# Altium PCB erb-pcb0002.PcbDoc
Units mm, origin at the board's own origin, x right, y up, seen from the top; angles counter-clockwise.
Board outline 37 x 24 mm, 4 copper layers (Top Layer, Signal_1, Signal_2, Top Bottom), stack 1.57 mm thick; 26 components, 49 nets, 129 pads, 38 vias.
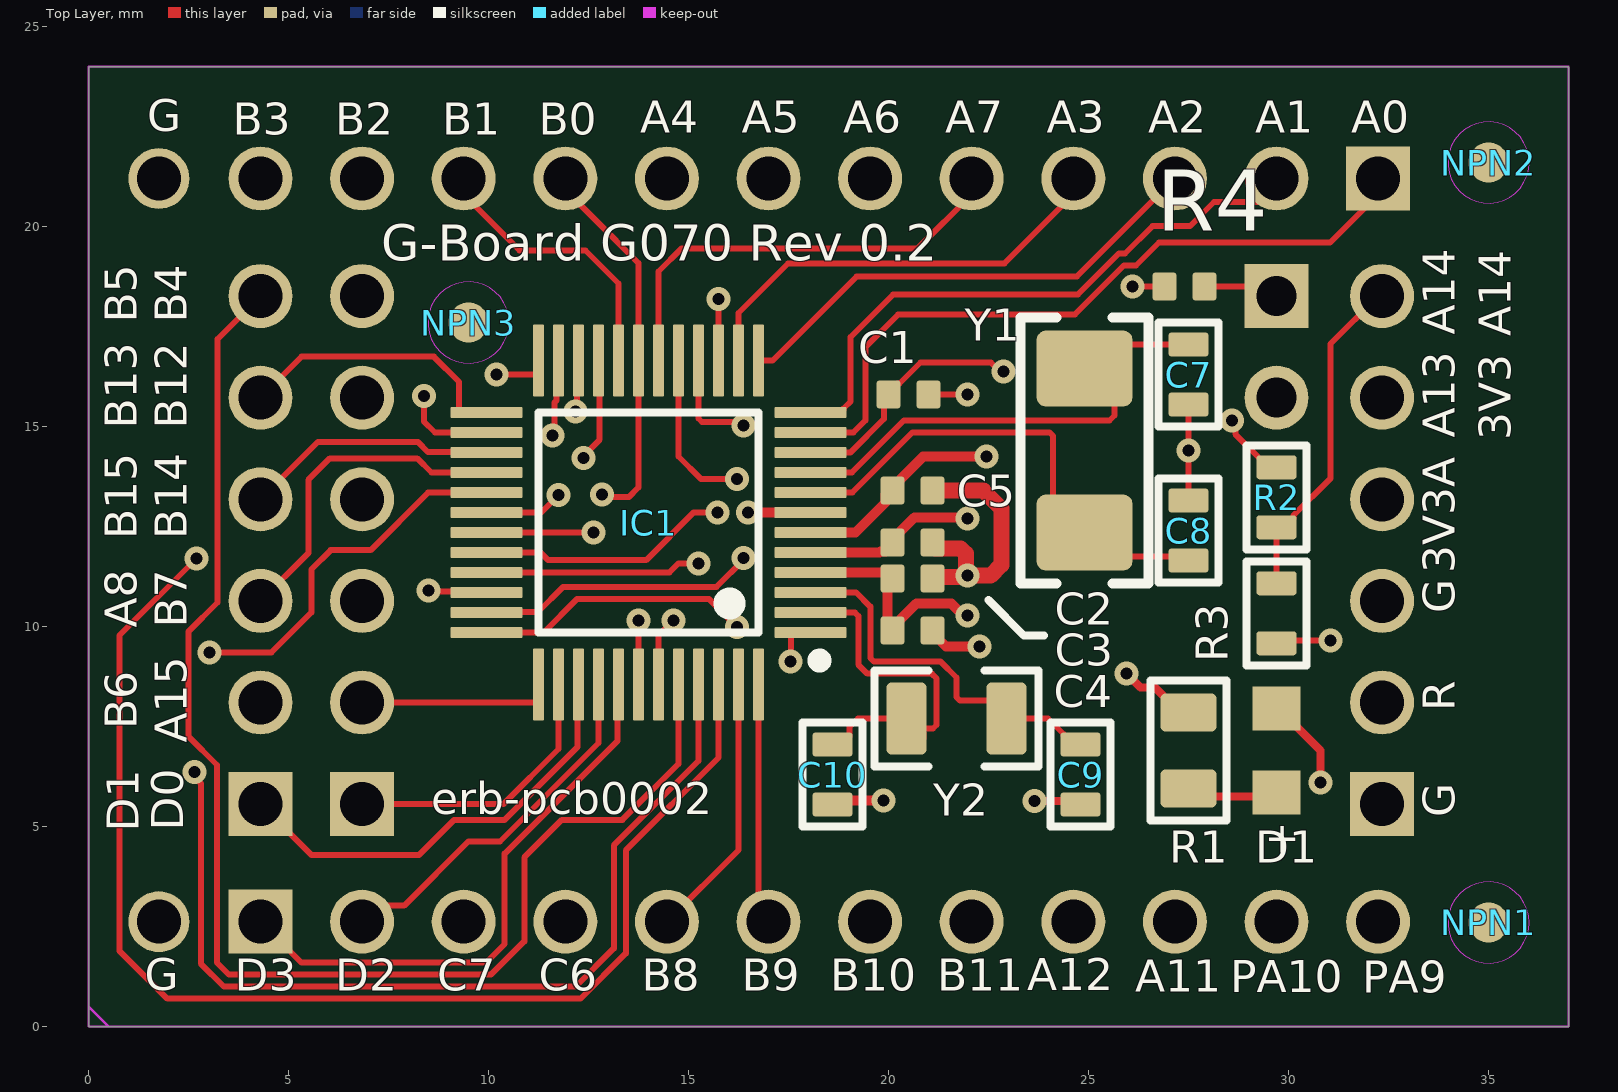
[diagram p0: Top Layer view]
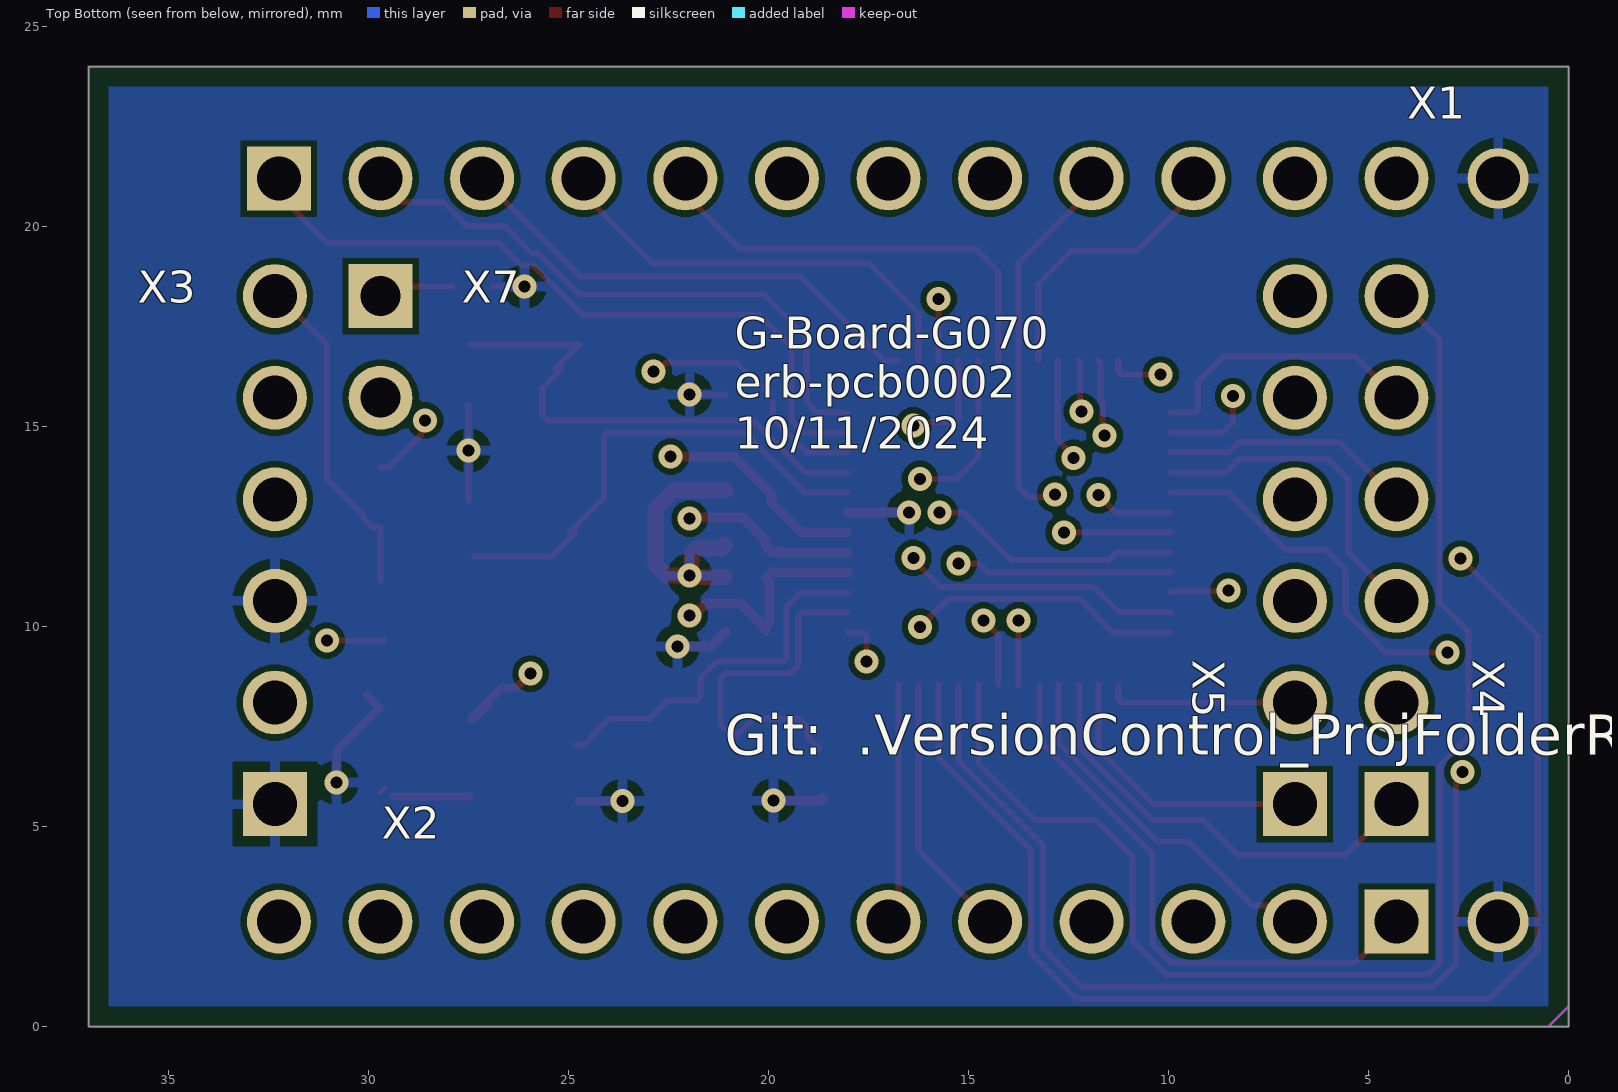
[diagram p1: Top Bottom view, seen from below]
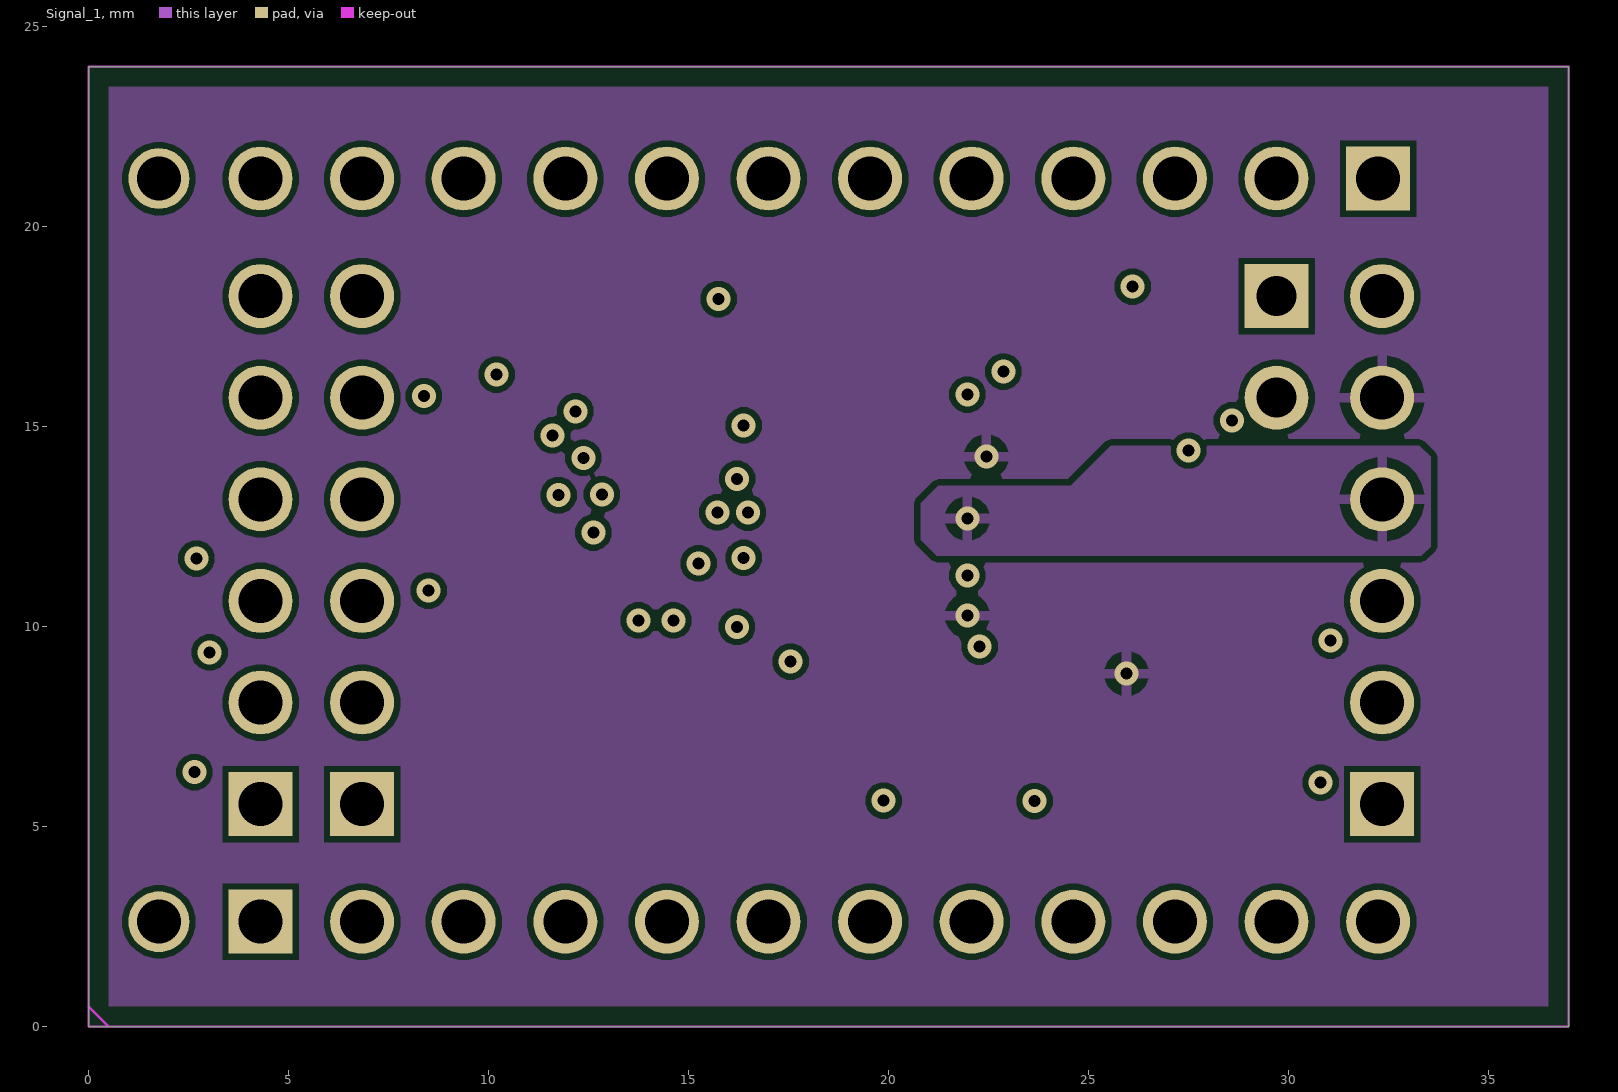
[diagram p2: Signal_1]
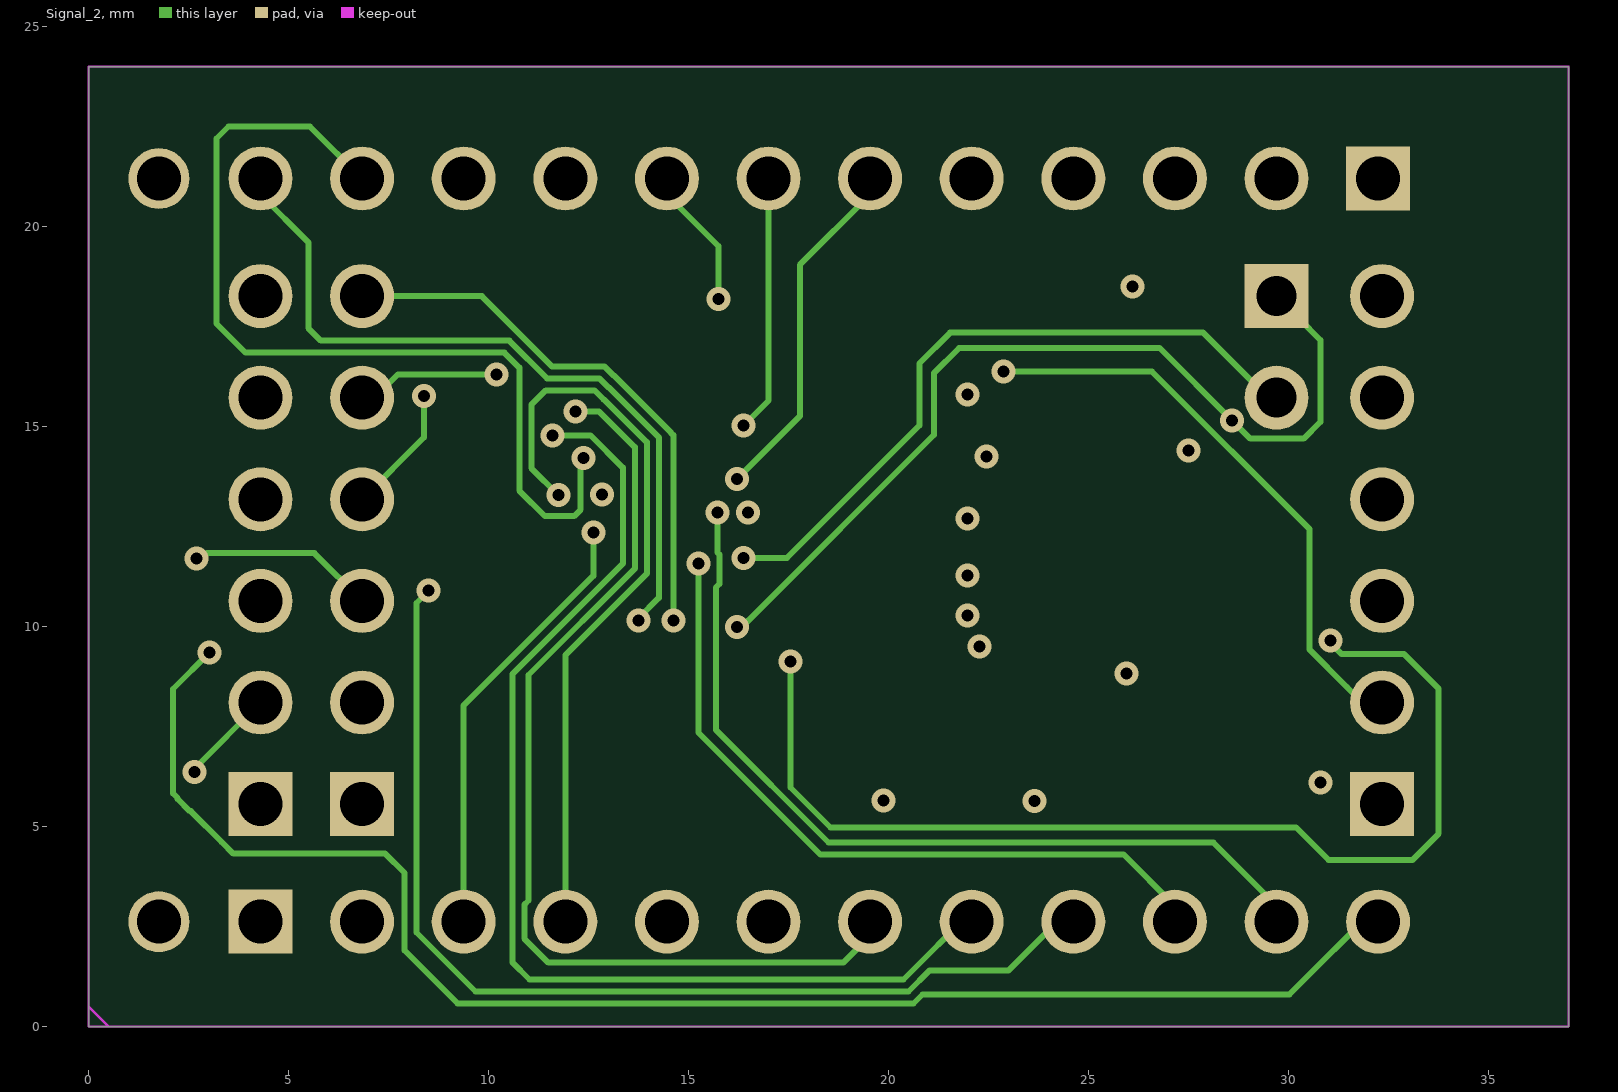
[diagram p3: Signal_2]
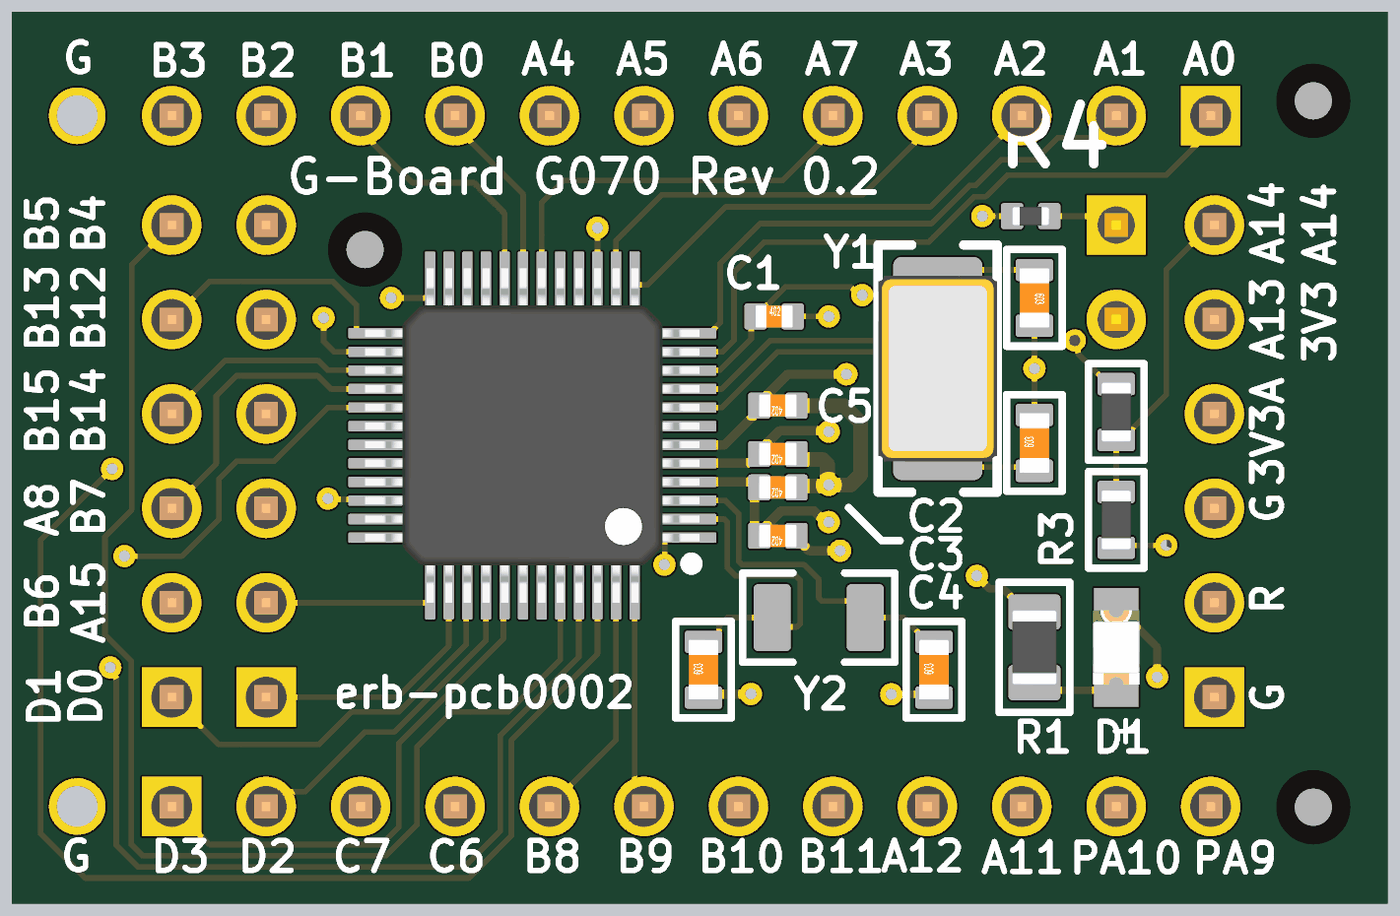
[diagram p4: 3D render of the assembled board from above, using the file's embedded part models]
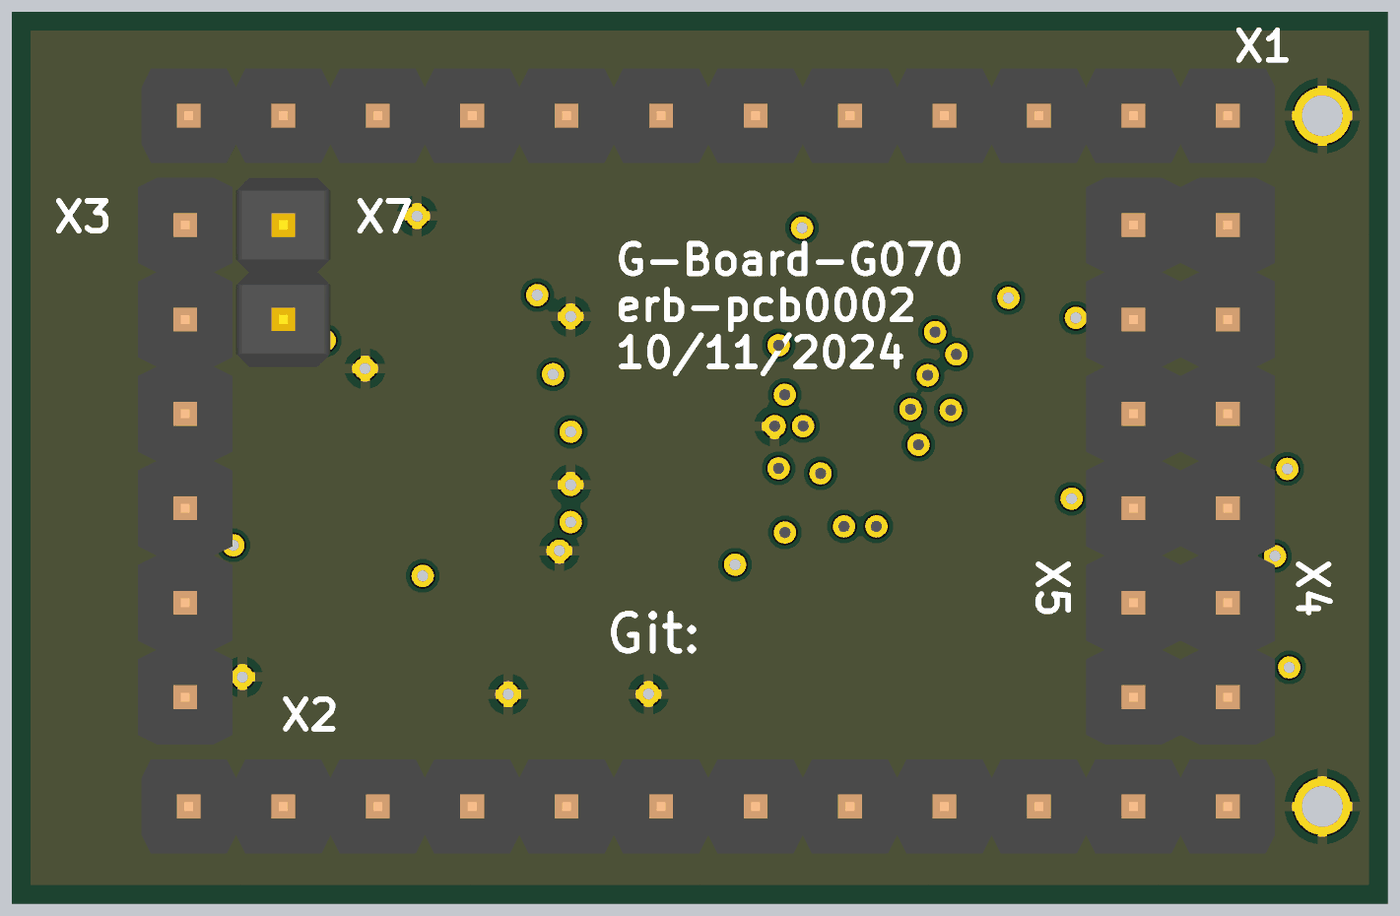
[diagram p5: 3D render of the assembled board from below, using the file's embedded part models]

## Layer stack, top to bottom
Top Solder: solder mask 0.0254, Solder Resist, Dk 3.5
Top Layer: signal copper 0.035
Dielectric 2: prepreg 0.2, PP-006, Dk 4.1
Signal_1: signal copper 0.0175
Dielectric 1: core 1.065, FR-4, Dk 4.6
Signal_2: signal copper 0.0175
Dielectric 3: prepreg 0.2, PP-006, Dk 4.1
Top Bottom: signal copper 0.035
Bottom Solder: solder mask 0.0254, Solder Resist, Dk 3.5

## Board outline
0,24 37,24 37,0 0,0

## Design rules (kind name [scope] priority, off if disabled: settings)
AssemblyTestPointUsage AssemblyTestPointUsage_1 [All] p2:
AssemblyTestpoint AssemblyTestpoint_1 [All] p2: testpointundercomponent=TRUE minsize=1.016 maxsize=2.54 preferedsize=1.524 minholesize=0 maxholesize=1.016 preferedholesize=0.813 testpointgrid=0.025 usegrid=TRUE gridtolerance=0 allowsidetop=TRUE allowsidebottom=TRUE
BoardOutlineClearance [All] p1: gap=0.5 ignorepadtopadclearanceinfootprint=FALSE except(0: Text-OutlineEdge Text-CavityEdge Text-CutoutEdge Text-SplitBarrior Text-SplitContinuation)
Clearance [All] p1: gap=0.15 ignorepadtopadclearanceinfootprint=TRUE
ComponentClearance [All] p1 off: gap=0.254 collisioncheckmode=3 verticalgap=0.254 showdistances=FALSE
DiffPairsRouting [All] p1: maxlimit=0.15 minlimit=0.15 mostfreqgap=0.15 toplayer_minwidth=0.25 toplayer_maxwidth=0.25 toplayer_prefwidth=0.25 midlayer1_minwidth=0.175 midlayer1_maxwidth=0.175 midlayer1_prefwidth=0.175 midlayer2_minwidth=0.175 midlayer2_maxwidth=0.175 midlayer2_prefwidth=0.175 bottomlayer_minwidth=0.25 bottomlayer_maxwidth=0.25 bottomlayer_prefwidth=0.25 impedanceprofiledriven=TRUE impedanceprofileid={FBCF767A-6538-404B-8383-ADABDCF97456} impedanceprofilevalue=90.000000 maxuncoupledlength=12.7
FabricationTestPointUsage FabricationTestPointUsage_1 [All] p2: valid=0 allowmultiple=FALSE
FabricationTestpoint FabricationTestpoint_1 [All] p2: side=3 testpointundercomponent=TRUE minsize=1.016 maxsize=2.54 preferedsize=1.524 minholesize=0 maxholesize=1.016 preferedholesize=0.813 testpointgrid=0.025 allowsidetop=TRUE allowsidebottom=TRUE usegrid=TRUE gridtolerance=0
FanoutControl Fanout_LCC [IsLCC] p1: bgadir=Out bgaviamode=Centered fanoutstyle=Auto fanoutdirection=Alternating viagrid=0.025 // Fanout_LCC (Default Rule)
FanoutControl Fanout_BGA [IsBGA] p2: bgadir=Out bgaviamode=Centered fanoutstyle=Auto fanoutdirection=Alternating viagrid=0.025 // Fanout_BGA (Default Rule)
FanoutControl Fanout_Default [All] p4: bgadir=Out bgaviamode=Centered fanoutstyle=Auto fanoutdirection=Alternating viagrid=0.025 // Fanout_Default (Default Rule)
FanoutControl Fanout_Small [(CompPinCount < 5)] p5: bgadir=Out bgaviamode=Centered fanoutstyle=Auto fanoutdirection=OutThenIn viagrid=0.025 // Fanout_Small (Default Rule)
FanoutControl Fanout_BGA_1 [IsBGA] p6: bgadir=Out bgaviamode=Centered fanoutstyle=Auto fanoutdirection=Alternating viagrid=0.025 // Fanout_BGA (Default Rule)
FanoutControl Fanout_LCC_1 [IsLCC] p7: bgadir=Out bgaviamode=Centered fanoutstyle=Auto fanoutdirection=Alternating viagrid=0.025 // Fanout_LCC (Default Rule)
FanoutControl Fanout_SOIC_1 [IsSOIC] p8: bgadir=Out bgaviamode=Centered fanoutstyle=Auto fanoutdirection=Alternating viagrid=0.025 // Fanout_SOIC (Default Rule)
FanoutControl Fanout_Small_1 [(CompPinCount < 5)] p9: bgadir=Out bgaviamode=Centered fanoutstyle=Auto fanoutdirection=OutThenIn viagrid=0.025 // Fanout_Small (Default Rule)
FanoutControl Fanout_Default_1 [All] p10: bgadir=Out bgaviamode=Centered fanoutstyle=Auto fanoutdirection=Alternating viagrid=0.025 // Fanout_Default (Default Rule)
Height [All] p1: minheight=0 maxheight=500 prefheight=12.7
HoleSize HoleSize_1 [All] p1: absolutevalues=TRUE maxlimit=6 minlimit=0.025 maxpercent=80.000 minpercent=20.000
HoleToHoleClearance [All] p1: gap=0.2 allowstackedmicrovias=TRUE
MinimumAnnularRing [All] p1: minimumring=0.15
MinimumSolderMaskSliver MinimumSolderMaskSliver_1 [All] p1: minsoldermaskwidth=0.1
PlaneClearance PlaneClearance_1 [All] p2: clearance=0.508
PlaneConnect PlaneConnect_1 [All] p2: planeconnectstyle=Relief reliefexpansion=50 reliefentries=4 reliefconductorwidth=2 reliefairgap=0.2
PlaneConnect Via [IsVia] p3: planeconnectstyle=Direct reliefexpansion=0.508 reliefentries=4 reliefconductorwidth=0.254 reliefairgap=0.254
PolygonConnect PolygonConnect_2 [OnLayer('Top Layer')] p1: thpad.connectstyle=Relief thpad.reliefconductorwidth=0.254 thpad.reliefentries=4 thpad.polygonreliefangle="90 Angle" thpad.airgapwidth=0.254 smdpad.connectstyle=NoConnect smdpad.reliefconductorwidth=0.254 smdpad.reliefentries=4 smdpad.polygonreliefangle="90 Angle" smdpad.airgapwidth=0.254 via.connectstyle=Relief via.reliefconductorwidth=0.254 via.reliefentries=4 via.polygonreliefangle="90 Angle" via.airgapwidth=0.254
PolygonConnect [All] p2: connectstyle=Relief reliefconductorwidth=0.254 reliefentries=4 polygonreliefangle="90 Angle" airgapwidth=0.254
PolygonConnect Polygon [IsVia] p3: connectstyle=Direct reliefconductorwidth=0.25 reliefentries=4 polygonreliefangle="90 Angle" airgapwidth=0.25
PolygonConnect PolygonConnect_1 [All] p4: connectstyle=Relief reliefconductorwidth=0.254 reliefentries=4 polygonreliefangle="90 Angle" airgapwidth=0.254
RoutingVias RoutingVias_1 [All] p1: holewidth=0.3 width=0.6 viastyle="Through Hole" minholewidth=0.3 minwidth=0.6 maxholewidth=0.3 maxwidth=0.6
SilkToSilkClearance SilkToSilkClearance_1 [All] p1 off: silktosilkclearance=0
SolderMaskExpansion SolderMaskExpansion_VIA [IsVia] p1: expansion=0 istentingtop=FALSE soldermaskfromhole=TRUE
SolderMaskExpansion SolderMaskExpansion_1 [All] p2: expansion=0.05 istentingtop=FALSE
Width Width_1 [InNetClass('SD_CARD')] p1: maxlimit=0.35 minlimit=0.27 preferedwidth=0.35 toplayer_minwidth=0.35 midlayer1_maxwidth=0.27 midlayer1_prefwidth=0.27 midlayer2_maxwidth=0.27 midlayer2_prefwidth=0.27 bottomlayer_minwidth=0.35 impedanceprofiledriven=TRUE impedanceprofileid={85F77CA9-F07E-4DD7-AF50-05B7DE60F978} impedanceprofilevalue=50.000000 minimp=50.000000 maximp=50.000000 favimp=50.000000
Width [All] p2: maxlimit=1 minlimit=0.15 preferedwidth=0.3 minimp=50.000000 maximp=50.000000 favimp=50.000000
19 further rules are at their usual default settings.

## Components (designator, comment, footprint, x,y, rotation, side; value= is the part's Value field where it differs from the comment)
C1 "100nF" CAPC1005X55 20.5,15.8 r0 top
C2 "100nF" CAPC1005X55 20.6,12.1 r180 top
C3 "100nF" CAPC1005X55 20.6,11.2 r180 top
C4 "1uF" CAPC1005X55 20.6,9.9 r180 top
C5 "100nF" CAPC1005X55 20.6,13.4 r180 top
C7 "22pF" CAPC1608X95N 27.5,16.3 r270 top
C8 "22pF" CAPC1608X95N 27.5,12.4 r90 top
C9 "8.2pF" CAPC1608X95N 24.8,6.3 r90 top
C10 "8.2pF" CAPC1608X95N 18.6,6.3 r90 top
D1 "RED" WL-SMCW_0805 29.7,6.9 r270 top
IC1 "STM32G070CBT6" LQFP-48_7x7x05P 14,12.6 r90 top locked
NPN1 "FID" Fiducial_1mm 35,2.6 r90 top
NPN2 "FID" Fiducial_1mm 35,21.6 r90 top
NPN3 "FID" Fiducial_1mm 9.5,17.6 r90 top
R1 "130R" RESC2012X70N 27.5,6.9 r270 top
R2 "0R" RESC1608X55N 29.7,13.23 r270 top
R3 "DNP" RESC1608X55N 29.7,10.33 r270 top
R4 "100k" RESC1005X40N 27.4,18.5 r180 top
X1 "HDR 1x12" 61301211121_no 18.27,21.2 r180 bottom
X2 "HDR 1x12" 61301211121_no 18.27,2.62 r0 bottom
X3 "HDR 1x6" 61300611121_no 32.34,11.91 r90 bottom
X4 "HDR 1x6" 61300611121_no 4.3,11.91 r90 bottom
X5 "HDR 1x6" 61300611121_no 6.84,11.91 r90 bottom
X7 "HDR 1x2" CON_HEADER2.54_1X2W_NO 29.7,15.72 r180 bottom
Y1 "8MHz ±20ppm 20pF" SMD-5032_2P 24.9,14.4 r90 top
Y2 "32.768KHz ±20ppm 12.5pF" "SMD-3215_2P FC - 135" 21.7,7.7 r180 top

## Footprints (in the part's own frame and the unit in brackets; to place one, negate y for a bottom-side part, rotate by r counter-clockwise, add the part's x,y. Pads: shape width x height; smd on the part's side, far side on the other; paste and mask are expansions set on the pad)
61300611121_no [mm] "Pin Header, pitch 2.54 mm, THT, Vertical, single row, 6p"
  rect 1.6x1.6 hole 1.1: 1(-6.35,0)
  round 1.6 hole 1.1: 2(-3.81,0) 3(-1.27,0) 4(1.27,0) 5(3.81,0) 6(6.35,0)
  body extent -7.62,-1.27 7.62,1.27, height 8.57
61301211121_no [mm] "Pin Header, pitch 2.54 mm, THT, Vertical, single row, 12p"
  rect 1.6x1.6 hole 1.1: 1(-13.97,0)
  round 1.6 hole 1.1: 2(-11.43,0) 3(-8.89,0) 4(-6.35,0) 5(-3.81,0) 6(-1.27,0) 7(1.27,0) 8(3.81,0) 9(6.35,0) 10(8.89,0) 11(11.43,0) 12(13.97,0)
  body extent -15.24,-1.27 15.24,1.27, height 8.57
CAPC1005X55 [mm] "Chip Capacitor, 2-Leads, Body 1,0x0,5mm, imperial 0402"
  rrect25% 0.6x0.7 smd: 1(-0.5,0) 2(0.5,0)
  body extent -0.5,-0.3 0.5,0.3, height 0.55
CAPC1608X95N [mm] "Chip Capacitor, 2-Leads, Body 1,6x0,8mm, imperial 0603"
  rrect25% 0.6x1 smd: 1(-0.75,0) 2(0.75,0)
  silkscreen extent -1.3,-0.75 1.3,0.75, body extent -0.8,-0.4 0.8,0.4, height 0.3
CON_HEADER2.54_1X2W_NO [mm]
  rect 1.6x1.6 hole 1: 1(0,2.54)
  round 1.6 hole 1: 2(0,0)
  body extent -1.27,-1.27 1.27,3.81, height 9.51
Fiducial_1mm [mm]
  round 1 smd mask+0.5: 0(0,0)
  Top Layer keep-out circle w0.01: c0,0 r1.016
LQFP-48_7x7x05P [mm]
  rrect25% 0.28x1.8 smd mask+0.051: 1(-2.75,-4.05) 2(-2.25,-4.05) 3(-1.75,-4.05) 4(-1.25,-4.05) 5(-0.75,-4.05) 6(-0.25,-4.05) 7(0.25,-4.05) 8(0.75,-4.05) 9(1.25,-4.05) 10(1.75,-4.05) 11(2.25,-4.05) 12(2.75,-4.05) 25(2.75,4.05) 26(2.25,4.05) 27(1.75,4.05) 28(1.25,4.05) 29(0.75,4.05) 30(0.25,4.05) 31(-0.25,4.05) 32(-0.75,4.05) 33(-1.25,4.05) 34(-1.75,4.05) 35(-2.25,4.05) 36(-2.75,4.05)
  rrect25% 1.8x0.28 smd mask+0.051: 13(4.05,-2.75) 14(4.05,-2.25) 15(4.05,-1.75) 16(4.05,-1.25) 17(4.05,-0.75) 18(4.05,-0.25) 19(4.05,0.25) 20(4.05,0.75) 21(4.05,1.25) 22(4.05,1.75) 23(4.05,2.25) 24(4.05,2.75) 37(-4.05,2.75) 38(-4.05,2.25) 39(-4.05,1.75) 40(-4.05,1.25) 41(-4.05,0.75) 42(-4.05,0.25) 43(-4.05,-0.25) 44(-4.05,-0.75) 45(-4.05,-1.25) 46(-4.05,-1.75) 47(-4.05,-2.25) 48(-4.05,-2.75)
  silkscreen extent -3.6,-4.42 2.75,2.75, body extent -4.5,-4.5 4.5,4.5, height 1.6
RESC1005X40N [mm] "Chip Resistor, 2-Leads, Body 1,0x0,5mm, imperial 0402"
  rrect25% 0.6x0.7 smd: 1(-0.5,0) 2(0.5,0)
  body extent -0.5,-0.25 0.5,0.25, height 0.4
RESC1608X55N [mm] "Chip Resistor, 2-Leads, Body 1,6x0,85mm, imperial 0603"
  rrect25% 0.6x1 smd: 1(-0.75,0) 2(0.75,0)
  silkscreen extent -1.3,-0.75 1.3,0.75, body extent -0.8,-0.4 0.8,0.4, height 0.55
RESC2012X70N [mm] "Chip Resistor, 2-Leads, Body 2,0x1,25mm, imperial 0805"
  rrect25% 0.95x1.4 smd: 1(-0.95,0) 2(0.95,0)
  silkscreen extent -1.75,-0.95 1.75,0.95, body extent -1,-0.6 1,0.6, height 0.7
"SMD-3215_2P FC - 135" [mm]
  rrect25% 1x1.8 smd: 1(-1.25,0) 2(1.25,0)
  silkscreen extent -2.05,-1.2 2.05,1.2
SMD-5032_2P [mm]
  rrect25% 1.9x2.4 smd: 1(-2.05,0) 2(2.05,0)
  silkscreen extent -3.32,-1.6 3.32,1.6, body extent -2.5,-1.6 2.5,1.6, height 0.95
WL-SMCW_0805 [mm] "SMD Mono-color Chip LED, body 2.0x1.25mm"
  rect 1.1x1.2 smd: A(1.05,0) K(-1.05,0)
  body extent -1,-0.63 1,0.62, height 0.7

## Part data
C1 C2 C3 C5: library part CAP_100nF_0402, "X7R 100nF ±10% 16V 0402 Multilayer Ceramic Capacitors MLCC - SMD/SMT ROHS", JLC=C1525, Manufacturer="Samsung Electro-Mechanics", Manufacturer Part Number=CL05B104KO5NNNC, Tolerance=10%, Voltage Rating=16VDC, Alternatives allowed=yes
C4: library part CAP_1uF_0402, "X5R 25V ±10% 1uF 0402 Multilayer Ceramic Capacitors MLCC - SMD/SMT ROHS", JLC=C52923, Manufacturer="Samsung Electro-Mechanics", Manufacturer Part Number=CL05A105KA5NQNC, Tolerance=10%, Voltage Rating=25V, Alternatives allowed=yes
C7 C8: library part CAP_22pF_50V_0603, "Chip capacitors", JLC=C1653, Manufacturer="Samsung Electro-Mechanics", Manufacturer Part Number=CL10C220JB8NNNC, Voltage Rating=50V, Alternatives allowed=YES, Notes="C0G, 0402"
C9 C10: library part CAP_8p2_50V_0603, "Multilayer Ceramic Capacitors MLCC - SMD/SMT 0402 8.0pF 50volts C0G +/-0.5pF", JLC=C1685, Manufacturer="Guangdong Fenghua Advanced Tech", Manufacturer Part Number=0603CG8R2C500NT, Voltage Rating=50V, Alternatives allowed=YES, Notes="C0G, 0402"
D1: library part LED_0805_RED_AK, "Standard LEDs - SMD WL-SMCW SMDMono TpVw Waterclr 0805 Red", JLC=C84256, Manufacturer="Wurth Elektronik", Manufacturer Part Number=150080RS75000, Voltage Rating=2.0, Alternatives allowed=YES
IC1: "ARM Mikrocontroller - MCU Mainstream Value line, Arm Cortex-M0+ MCU 128 Kbytes of Flash 36 Kbytes RAM, 64", JLC=C529338, Manufacturer=STMicroelectronics, ComponentLink1Description=供应商链接, ComponentLink1URL=http://www.szlcsc.com/product/details_9243.html, Manufacturer Part Number=STM32G070CBT6
NPN1 NPN2 NPN3: library part Fiducial_1mm
R1: library part RES_130R_0805, "Dickfilmwiderstände - SMD 1/8watt 130ohms 1% 100ppm", JLC=C17437, Manufacturer="Vishay / Dale", Manufacturer Part Number=CRCW0805130RFKEA, Tolerance=1%, Voltage Rating=150V, Alternatives allowed=YES
R2: library part RES_0R_0603, "Thick Film Resistors - SMD 1/10watt ZEROohm Jumper", JLC=C21189, Manufacturer=Vishay, Manufacturer Part Number=CRCW06030000Z0EA, Tolerance=1%, Voltage Rating=75V, Alternatives allowed=YES
R3: library part RES_DNF_0603, "Resistor SMD 0603 - not populated", Notes="not populated"
R4: library part RES_100k_0402, "Thick Film Resistors - SMD 63mW 100Kohms 1%", JLC=C60491, Manufacturer=Vishay, Manufacturer Part Number=RC0402FR-07100KL, Tolerance=1%, Voltage Rating=50V, Alternatives allowed=YES
X1 X2: library part CON_HEADER_1X12_no_overlay, "Board-to-Board-Steckverbinder, 2.54 mm, 12 Kontakt(e), Stiftleiste 1-Reihig", Manufacturer=WE, Manufacturer Part Number=61301211121, Alternatives allowed=YES
X3 X4 X5: library part CON_HEADER_1X6_no_overlay, "Board-to-Board-Steckverbinder, 2.54 mm, 6 Kontakt(e), Stiftleiste 1-Reihig", Manufacturer=WE, Manufacturer Part Number=61300611121, Alternatives allowed=YES
X7: library part CON_HEADER_1X2_no_overlay, "Board-to-Board-Steckverbinder, 2.54 mm, 2 Kontakt(e), Stiftleiste 1-Reihig", Lumira Part Number=S-QMS-SPEC-32507, Manufacturer=Samtec, Manufacturer Part Number=TSW-102-07-T-S, Alternatives allowed=YES
Y1: library part "SMD-5032_2P 8MHz 20ppm 20pF", "8MHz SMD Crystal Resonator 20pF ±10ppm ±50ppm -40℃~+85℃ SMD5032-2P Crystals ROHS", JLC=C115962, Manufacturer="Yangxing Tech", Manufacturer Part Number=X50328MSB2GI, Package=SMD-5032_2P, ComponentLink1Description=供应商链接, ComponentLink1URL=http://www.szlcsc.com/product/details_117214.html
Y2: library part "SMD-3215_2P 32.768KHz 20ppm 12.5pF", "32.768kHz SMD Crystal Resonator 12.5pF 70kΩ ±20ppm -40℃~+85℃ SMD3215-2P Crystals ROHS", JLC=C32346, Manufacturer="Seiko Epson", Manufacturer Part Number=Q13FC1350000400, Package=SMD-3215_2P, ComponentLink1Description=供应商链接, ComponentLink1URL=http://www.szlcsc.com/product/details_33310.html, Supplier=LC

## Free pads (board coordinates)
  round 1.524 hole 1.1: 2(1.76,2.62) 2(1.76,21.2)

## Via types
v1: diameter 0.6, hole 0.3, Top Layer to Top Bottom, 38 vias

## Nets (pads, with @x,y where several pads share a name; then routed paths per layer and width w, separated by ;. In a path a pad name is that pad's centre, name@x,y a point inside that pad or via, vN(x,y) a via of type N, cw(c..) or ccw(c..) an arc to the next point about the centre after c; other vN are vias at no path point)
3V3: C3.2 C4.2 C5.2 IC1.4 IC1.6 R1.1 X3.5 | length 13.6
  Top Layer w0.15: R1.1@26.964,8.047 27.36,7.65 R1.1@27.47,7.65
  Top Layer w0.2: v1(25.95,8.822) 26.296,8.476 26.664,8.476 26.9,8.24 26.9,8.235 27.024,8.111 27.028,8.111 R1.1@27.425,7.715
  Top Layer w0.25: IC1.4@18.02,11.35 19.895,11.35 C3.2@20.058,11.188 ; IC1.6 19.175,12.35 19.925,13.1 19.925,13.305 20.865,14.245 v1(22.445,14.245) ; C4.2@20.07,9.9 C4.2@20.07,9.95 ; C3.2@20.07,11.2 C3.2@20.058,11.188 ; v1(21.97,10.27) 21.875,10.27 21.57,10.575 20.695,10.575 20.12,10 20.095,10 19.97,10.125 19.97,11.1 C3.2@20.058,11.188
3V3A: C2.2 IC1.5 X3.4 | length 4.4
  Top Layer w0.25: IC1.5@18.02,11.85 19.779,11.85 19.804,11.875 19.925,11.875 20.07,12.02 20.07,12.15 20.645,12.725 21.945,12.725 v1(21.97,12.7)
GND: C1.2 C2.1 C3.1 C4.1 C5.1 C7.2 C8.2 C9.1 C10.1 D1.K IC1.7 pad.2 R4.2 X3.1 X3.3 | length 19.1
  Top Layer w0.15: C1.2@21.07,15.8 v1(21.97,15.8) ; v1(26.1,18.5) R4.2 ; C8.2 v1(27.5,14.4) 27.5,15.541 C7.2@27.525,15.541
  Top Layer w0.2: v1(23.65,5.638) C9.1@24.75,5.638 ; D1.K@30.05,8.3 D1.K 29.75,7.95 30.8,6.9 v1(30.8,6.1)
  Top Layer w0.25: v1@16.36,12.725 v1(16.485,12.85) IC1.7@18.02,12.85 ; C10.1@18.64,5.713 18.707,5.645 v1(19.877,5.645) ; C4.1@21.07,9.87 21.08,9.87 21.275,9.675 21.275,9.665 21.44,9.5 v1(22.275,9.5) ; C3.1@21.07,11.2 C3.1@21.105,11.235 ; v1@21.935,11.235 v1(21.97,11.27)
  Top Layer w0.4: C2.1@21.07,12.05 21.17,11.95 21.805,11.95 21.932,11.823 21.932,11.308 v1(21.97,11.27) 22.551,11.27 22.82,11.539 22.82,12.95 22.37,13.4 C5.1 C5.1@21.07,13.4 ; C3.1@21.105,11.235 v1@21.935,11.235
NetC7_1: C7.1 IC1.9 Y1.2 | length 13.2
  Top Layer w0.15: IC1.9@18.02,13.85 IC1.9 19.085,13.85 20.385,15.15 25.525,15.15 25.65,15.275 25.65,15.97 Y1.2@25.17,16.45 ; Y1.2@25.332,16.45 24.726,17.056 C7.1@27.475,17.056
NetC8_1: C8.1 IC1.8 Y1.1 | length 12.3
  Top Layer w0.15: IC1.8@18.02,13.35 19.096,13.35 20.596,14.85 24.028,14.85 24.116,14.762 24.116,13.213 Y1.1@24.979,12.35 ; Y1.1@24.82,12.35 25.425,11.745 C8.1@27.365,11.745
NetC9_2: C9.2 IC1.3 Y2.1 | length 9.4
  Top Layer w0.15: IC1.3@18.02,10.85 IC1.3 19.19,10.85 19.545,10.495 19.545,9.501 19.55,9.496 19.55,9.209 19.638,9.122 21.303,9.122 21.7,8.724 21.7,8.233 21.788,8.145 22.529,8.145 22.95,7.724 Y2.1 23.988,7.7 24.375,7.313 24.375,7.275 24.6,7.05 C9.2
NetC10_2: C10.2 IC1.2 Y2.2 | length 8.9
  Top Layer w0.15: IC1.2@18.02,10.35 IC1.2 19.157,10.35 19.245,10.262 19.245,9.048 19.471,8.822 21.082,8.822 21.2,8.704 21.2,7.538 21.112,7.45 20.871,7.45 20.871,7.205 20.45,7.626 Y2.2 ; C10.2@18.74,6.961 19.025,7.246 19.025,7.487 19.238,7.7 Y2.2@20.22,7.7
NetD1_A: D1.A R1.2 | length 2
  Top Layer w0.15: D1.A@29.6,5.95 D1.A
  Top Layer w0.2: R1.2@27.47,5.75 D1.A@29.37,5.75
NetR2_2: R2.2 R3.1 X3.6 | length 8.3
  Top Layer w0.15: R3.1@29.7,11.145 R2.2 29.9,12.48 30.125,12.705 30.125,12.78 31.044,13.699 31.044,17.064 X3.6@32.24,18.26
PA0: IC1.11 X1.1 | length 17.8
  Top Layer w0.15: IC1.11@18.02,14.85 19.12,14.85 19.42,15.15 19.42,16.981 20.239,17.8 24.658,17.8 25.883,19.025 26.188,19.025 26.763,19.6 31.04,19.6 X1.1@32.24,20.8
PA1: IC1.12 X1.2 | length 14.9
  Top Layer w0.15: IC1.12@18.02,15.35 18.81,15.35 18.875,15.415 18.875,15.45 19.051,15.626 19.051,17.237 20.114,18.3 24.733,18.3 25.758,19.325 25.913,19.325 26.599,20.011 27.536,20.011 28.138,20.613 29.513,20.613 X1.2@29.7,20.8
PA2: IC1.13 X1.3 | length 12.3
  Top Layer w0.15: IC1.13 17.105,16.65 19.205,18.75 24.71,18.75 X1.3
PA3: IC1.14 X1.4 | length 10.8
  Top Layer w0.15: IC1.14 16.25,17.839 17.486,19.075 22.895,19.075 X1.4@24.62,20.8
PA4: IC1.15 X1.8 | length 4.8
  Top Layer w0.15: X1.8@14.46,20.69 X1.8@14.46,20.8 ; IC1.15 v1(15.75,18.186)
  Signal_2 w0.15: X1.8@14.46,20.8 15.75,19.51 v1(15.75,18.186)
PA5: IC1.16 X1.7 | length 8.8
  Top Layer w0.15: IC1.16 15.25,15.2 15.338,15.112 16.294,15.112 v1(16.38,15.026) ; X1.7@17,20.73 X1.7@17,20.8
  Signal_2 w0.15: v1(16.38,15.026) 17,15.646 X1.7@17,20.8
PA6: IC1.17 X1.6 | length 12.6
  Top Layer w0.15: IC1.17 14.75,14.25 15.307,13.693 v1(16.214,13.693)
  Signal_2 w0.15: v1(16.214,13.693) 17.781,15.261 17.781,19.041 X1.6@19.54,20.8
PA7: IC1.18 X1.5 | length 10.9
  Top Layer w0.15: IC1.18 14.25,17.291 14.25,18.875 14.83,19.455 20.735,19.455 X1.5@22.08,20.8
PA8: IC1.28 X4.3 | length 8.3
  Top Layer w0.15: X4.3 5.496,11.836 5.496,13.668 6.033,14.205 8.218,14.205 8.573,13.85 IC1.28
PA9: IC1.29 X2.12 | length 47.6
  Top Layer w0.15: v1(3.03,9.355) 4.574,9.355 5.57,10.351 5.57,11.424 6.056,11.91 7.052,11.91 8.492,13.35 IC1.29
  Signal_2 w0.15: v1(3.03,9.355) 2.112,8.437 2.112,5.83 2.225,5.717 2.225,5.692 2.533,5.385 2.558,5.385 3.325,4.617 3.619,4.323 7.417,4.323 7.9,3.84 7.9,1.905 9.23,0.575 20.623,0.575 20.849,0.8 30.02,0.8 X2.12@32.24,3.02
PA10: IC1.32 X2.11 | length 27.7
  Top Layer w0.15: IC1.32 11.303,11.85 11.492,11.661 13.939,11.661 15.13,12.852 v1(15.721,12.852)
  Signal_2 w0.15: v1(15.721,12.852) 15.721,11.851 15.775,11.797 15.775,11.065 15.685,10.975 15.685,7.415 18.5,4.6 28.12,4.6 X2.11@29.7,3.02
PA11: IC1.33 X2.10 | length 23.3
  Top Layer w0.15: IC1.33 14.52,11.35 14.75,11.58 v1(15.25,11.58)
  Signal_2 w0.15: v1(15.25,11.58) 15.25,7.347 18.297,4.3 25.88,4.3 X2.10@27.16,3.02
PA12: IC1.34 X2.9 | length 28.1
  Top Layer w0.15: v1(8.5,10.9) 8.519,10.881 9.919,10.881 IC1.34
  Signal_2 w0.15: v1(8.5,10.9) 8.5,10.887 8.2,10.587 8.2,2.35 9.675,0.875 20.499,0.875 21.019,1.395 22.995,1.395 X2.9@24.62,3.02
PA13: IC1.35 X7.2 | length 24.3
  Top Layer w0.15: IC1.35 9.963,10.363 11.238,10.363 11.865,10.99 15.7,10.99 16.38,11.67 v1(16.38,11.716)
  Signal_2 w0.15: v1(16.38,11.716) 17.461,11.716 20.77,15.024 20.77,16.575 21.54,17.345 27.868,17.345 29.493,15.72 X7.2
PA14: IC1.36 R2.1 R4.1 X7.1 | length 32.8
  Top Layer w0.15: IC1.36 11.377,9.85 12.217,10.69 15.51,10.69 v1(16.21,9.99) ; R4.1 29.46,18.5 X7.1 ; v1(28.585,15.154) 28.672,15.068 28.672,14.809 29.5,13.98 R2.1
  Signal_2 w0.15: v1(16.21,9.99) 16.332,9.99 16.49,10.149 16.494,10.149 21.133,14.788 21.133,16.332 21.765,16.964 26.776,16.964 v1(28.585,15.154) 29.045,14.695 30.377,14.695 30.8,15.118 30.8,17.16 X7.1@30.266,17.694
PA15: IC1.37 X5.2 | length 4.8
  Top Layer w0.15: X5.2 11.185,8.1 11.25,8.165 IC1.37
PB0: IC1.19 X1.9 | length 9.2
  Top Layer w0.15: X1.9@11.92,20.8 12.035,20.8 12.64,20.195 13.75,19.085 IC1.19 13.75,13.48 13.507,13.236 12.902,13.236 v1(12.833,13.305)
PB1: IC1.20 X1.10 | length 6.7
  Top Layer w0.15: X1.10@9.38,20.8 10.78,19.4 12.425,19.4 13.25,18.575 IC1.20
PB2: IC1.21 X1.11 | length 26.4
  Top Layer w0.15: X1.11@6.84,20.8 X1.11@7.17,20.8 ; v1@12.427,14.319 12.78,14.671 12.78,16.62 IC1.21
  Signal_2 w0.15: X1.11@6.84,20.8 6.84,21.192 5.532,22.5 3.5,22.5 3.2,22.2 3.2,17.573 3.924,16.848 10.394,16.848 10.773,16.47 10.773,13.396 11.411,12.757 12.139,12.757 12.301,12.919 12.301,14.149 v1(12.371,14.218)
PB3: IC1.42 X1.12 | length 20.1
  Top Layer w0.15: IC1.42@13.75,8.52 v1(13.75,10.154)
  Signal_2 w0.15: X1.12@4.3,20.8 5.496,19.604 5.496,17.46 5.808,17.148 10.518,17.148 11.461,16.206 12.773,16.206 12.998,15.981 13.008,15.981 14.258,14.731 14.258,10.715 13.75,10.207 v1(13.75,10.154)
PB4: IC1.43 X5.6 | length 15.6
  Top Layer w0.15: IC1.43 14.25,9.784 v1(14.62,10.154)
  Signal_2 w0.15: X5.6 9.831,18.26 11.585,16.506 12.897,16.506 13.122,16.281 13.132,16.281 14.558,14.855 14.558,14.845 14.62,14.783 v1(14.62,10.154)
PB5: IC1.44 X4.6 | length 34.6
  Top Layer w0.15: X4.6@4.19,18.15 3.223,17.184 3.223,10.599 2.505,9.881 2.505,7.246 3.212,6.539 3.212,1.595 3.512,1.295 10.06,1.295 10.895,2.13 10.895,4.228 11.832,5.165 13.347,5.165 14.75,6.568 IC1.44
PB6: IC1.45 X4.2 | length 25.7
  Top Layer w0.15: v1(2.649,6.36) 2.649,6.238 2.81,6.077 2.81,1.573 3.388,0.995 12.176,0.995 13.135,1.954 13.135,4.529 15.25,6.644 IC1.45
  Signal_2 w0.15: v1(2.649,6.36) 2.649,6.449 X4.2
PB7: IC1.46 X5.3 | length 36.6
  Top Layer w0.15: v1(2.698,11.7) 0.773,9.775 0.773,1.894 1.972,0.695 12.3,0.695 13.435,1.83 13.435,4.404 15.75,6.719 IC1.46
  Signal_2 w0.15: v1(2.698,11.7) 2.82,11.7 2.956,11.836 5.644,11.836 X5.3
PB8: IC1.47 X2.5 | length 6.7
  Top Layer w0.15: X2.5 16.25,4.41 IC1.47
PB9: IC1.48 X2.6 | length 5.6
  Top Layer w0.15: IC1.48 16.75,3.27 X2.6@17,3.02
PB10: IC1.22 X2.7 | length 26.1
  Top Layer w0.15: v1(12.173,15.381) 12.211,15.42 12.211,16.611 IC1.22
  Signal_2 w0.15: v1(12.173,15.381) 12.76,15.381 13.658,14.483 13.658,11.446 11,8.788 11,3.15 10.895,3.045 10.895,2.195 11.495,1.595 18.869,1.595 19.54,2.266 X2.7
PB11: IC1.23 X2.8 | length 29.9
  Top Layer w0.15: v1(11.598,14.781) 11.648,14.831 11.648,15.599 11.706,15.657 11.706,16.606 IC1.23
  Signal_2 w0.15: v1(11.598,14.781) 12.551,14.781 13.358,13.974 13.358,11.571 10.595,8.808 10.595,1.605 11.025,1.175 20.375,1.175 X2.8@22.08,2.88
PB12: IC1.24 X5.5 | length 5
  Top Layer w0.15: v1(10.2,16.3) 11.185,16.3 11.25,16.365 IC1.24
  Signal_2 w0.15: X5.5 7.155,15.72 7.735,16.3 v1(10.2,16.3)
PB13: IC1.25 X4.5 | length 7.1
  Top Layer w0.15: X4.5 5.325,16.745 8.635,16.745 9.263,16.117 9.263,15.415 9.328,15.35 IC1.25
PB14: IC1.26 X5.4 | length 5.5
  Top Layer w0.15: v1(8.385,15.763) 8.385,15.126 8.661,14.85 IC1.26
  Signal_2 w0.15: X5.4 8.385,14.725 v1(8.385,15.763)
PB15: IC1.27 X4.4 | length 6.4
  Top Layer w0.15: X4.4 5.736,14.616 8.11,14.616 8.232,14.616 8.485,14.363 9.938,14.363 IC1.27
PC6: IC1.30 X2.4 | length 20.6
  Top Layer w0.15: IC1.30 11.318,12.85 v1(11.75,13.282) ; X2.4@11.92,3.02 X2.4@11.97,3.07
  Signal_2 w0.15: v1(11.75,13.282) 11.073,13.959 11.073,15.547 11.432,15.906 12.648,15.906 12.873,15.681 12.884,15.681 13.958,14.607 13.958,11.322 11.92,9.284 X2.4@11.92,3.02
PC7: IC1.31 X2.3 | length 13.3
  Top Layer w0.15: IC1.31 12.618,12.35 v1(12.619,12.349)
  Signal_2 w0.15: X2.3@9.38,3.02 9.38,8.03 12.619,11.269 v1(12.619,12.349)
PC13: IC1.1 R3.2 | length 29.8
  Top Layer w0.15: v1(17.55,9.125) 17.556,9.131 17.556,9.785 17.621,9.85 IC1.1@18.02,9.85 ; R3.2@29.613,9.645 v1(31.044,9.645)
  Signal_2 w0.15: v1(17.55,9.125) 17.55,5.974 18.55,4.975 30.193,4.975 30.999,4.168 33.102,4.168 33.755,4.82 33.755,8.445 32.889,9.311 31.328,9.311 31.044,9.595 v1(31.044,9.645)
PD0: IC1.38 X5.1 | length 7.1
  Top Layer w0.15: X5.1 10.372,5.56 11.75,6.938 IC1.38
PD1: IC1.39 X4.1 | length 11.1
  Top Layer w0.15: X4.1 5.57,4.29 8.265,4.29 9.14,5.165 10.402,5.165 12.22,6.984 12.22,8.52 IC1.39
PD2: IC1.40 X2.2 | length 9.1
  Top Layer w0.15: X2.2@6.84,3.02 7.89,3.02 9.495,4.625 10.286,4.625 12.75,7.089 IC1.40
PD3: IC1.41 X2.1 | length 14.4
  Top Layer w0.15: X2.1 5.325,1.595 9.936,1.595 10.405,2.064 10.405,4.32 13.22,7.135 IC1.41@13.22,8.55
Reset: C1.1 IC1.10 X3.2 | length 20.5
  Top Layer w0.15: IC1.10@18.02,14.35 18.027,14.357 19.051,14.357 19.884,15.189 C1.1@19.884,15.614 ; C1.1 20,15.85 20.225,16.075 20.275,16.075 20.8,16.6 22.557,16.6 22.782,16.375 v1(22.87,16.375)
  Signal_2 w0.15: v1(22.87,16.375) 26.585,16.375 30.519,12.441 30.519,9.428 31.459,8.488 31.46,8.488 31.848,8.1 X3.2@32.24,8.1
pads on no net: NPN1.0 NPN2.0 NPN3.0

## Polygon pours and split planes (outlines as drawn)
3V3 on Signal_1 "3V3_L02_P002" (solid, pour order 2): 37,24 37,0 0,0 0,24
3V3A on Signal_1 "3V3A_L02_P001" (solid, pour order 1): 25.55,14.52 24.55,13.52 21.238,13.52 20.8,13.082 20.8,12.171 21.201,11.77 33.32,11.77 33.55,12 33.55,14.244 33.274,14.52
GND on Top Bottom "GND_L04_P000" (solid, pour order 0): 0,24 37,24 37,0 0,0

## Keep-outs
Keep-Out Layer:
  lines w0.05: 0,24 0,0 37,0 ; 0,24 37,24 ; 0,24 37,24 ; 0,24 0,0.5 0.5,0 37,0 ; 37,0 37,24 ; 37,0 37,1.289 37,2.381 37,4.444 37,6.75 37,23.5 37,24 ; 37,24 37,24

## Other copper
Top Layer:
  text ".Layer_Name" at 74.375,37.525 h1.2
  text ".Layer_Name" at 39.939,37.495 h1.2
Signal_1:
  text ".Layer_Name" at 74.375,37.525 h1.2
  text ".Layer_Name" at 39.935,37.489 h1.2
Signal_2:
  text ".Layer_Name" at 74.375,37.525 h1.2
  text ".Layer_Name" at 39.935,37.489 h1.2
Top Bottom:
  text ".Layer_Name" at 74.375,37.525 h1.2
  text ".Layer_Name" at 39.939,37.495 h1.2

## Silkscreen, mask and mechanical layers (free items; w line width, h text height)
Top Overlay:
  lines w0.2: 22.5,10.66 23.39,9.769 23.885,9.769
  text ".Layer_Name" at 74.375,35.525 h1.2
  text ".Layer_Name" at 39.875,35.5 h1.2
  text "Variant:" at 91.925,32.675 h1.2
  text "G" at 1.464,22.379 h0.8
  text "A4" at 13.794,22.345 h0.8
  text "A5" at 16.334,22.345 h0.8
  text "A6" at 18.874,22.345 h0.8
  text "A7" at 21.414,22.345 h0.8
  text "A3" at 23.954,22.345 h0.8
  text "A2" at 26.494,22.345 h0.8
  text "A1" at 29.167,22.345 h0.8
  text "A0" at 31.574,22.345 h0.8
  text "B3" at 3.6,22.3 h0.8
  text "B2" at 6.174,22.3 h0.8
  text "B1" at 8.847,22.3 h0.8
  text "B0" at 11.254,22.3 h0.8
  text "G-Board G070 Rev 0.2" at 7.316,19.141 h0.9
  text "B5" at 1.2,17.594 h0.8 r90
  text "B4" at 2.45,17.594 h0.8 r90
  text "A14" at 34.15,17.3 h0.8 r90
  text "A14" at 35.55,17.26 h0.8 r90
  text "B13" at 1.2,14.945 h0.8 r90
  text "B12" at 2.45,14.945 h0.8 r90
  text "A13" at 34.15,14.72 h0.8 r90
  text "3V3" at 35.55,14.654 h0.8 r90
  text "B15" at 1.2,12.18 h0.8 r90
  text "B14" at 2.45,12.18 h0.8 r90
  text "3V3A" at 34.15,11.334 h0.8 r90
  text "G" at 34.15,10.333 h0.8 r90
  text "A8" at 1.2,9.974 h0.8 r90
  text "B7" at 2.45,9.974 h0.8 r90
  text "R" at 34.15,7.885 h0.8 r90
  text "B6" at 1.2,7.434 h0.8 r90
  text "A15" at 2.45,7.1 h0.8 r90
  text "erb-pcb0002" at 8.565,5.303 h0.8
  text "G" at 34.15,5.233 h0.8 r90
  text "D0" at 2.372,4.894 h0.8 r90
  text "D1" at 1.25,4.867 h0.8 r90
  text "G" at 1.411,0.911 h0.8
  text "D3" at 3.65,0.895 h0.8
  text "D2" at 6.174,0.895 h0.8
  text "C7" at 8.714,0.895 h0.8
  text "C6" at 11.254,0.895 h0.8
  text "B8" at 13.834,0.895 h0.8
  text "B9" at 16.334,0.895 h0.8
  text "B10" at 18.54,0.895 h0.8
  text "B11" at 21.214,0.895 h0.8
  text "A12" at 23.47,0.904 h0.8
  text "A11" at 26.163,0.866 h0.8
  text "PA10" at 28.544,0.851 h0.8
  text "PA9" at 31.844,0.85 h0.8
Bottom Overlay:
  text ".Layer_Name" at 74.375,35.525 h1.2
  text ".Layer_Name" at 39.875,35.5 h1.2
  text "Variant:" at 91.925,32.675 h1.2
  text "G-Board-G070" at 20.85,16.95 h0.8
  text "erb-pcb0002" at 20.85,15.717 h0.8
  text "10/11/2024" at 20.85,14.45 h0.8
  text ".VersionControl_ProjFolderRevNumberShort" at 17.8,6.8 h1
  text "Git:" at 21.1,6.8 h1
Top Paste:
  text ".Layer_Name" at 74.375,33.525 h1.2
  text ".Layer_Name" at 39.875,33.5 h1.2
Bottom Paste:
  text ".Layer_Name" at 74.375,33.525 h1.2
  text ".Layer_Name" at 39.875,33.5 h1.2
Top Solder:
  text ".Layer_Name" at 74.375,31.525 h1.2
  text ".Layer_Name" at 39.875,31.5 h1.2
Bottom Solder:
  text ".Layer_Name" at 74.375,31.575 h1.2
  text ".Layer_Name" at 39.875,31.55 h1.2
Mechanical 1:
  lines w0.05: 37,0.5 37,23.5 ; 0,0.5 0,0.5 ; 0,0.5 0,23.5 ; 0,23.5 0,23.5 ; 0,0 0,24 37,24 37,0 0,0
  text ".Layer_Name" at 74.375,29.825 h1.2
  text ".Layer_Name" at 39.875,29.8 h1.2
Mechanical 2:
  text ".Layer_Name" at 74.375,28.025 h1.2
  text ".Layer_Name" at 39.875,28 h1.2
  text "all dimensions in mm" at 4.554,-2.246 h1.52
Drill Drawing:
  circle w0.254: c40.887,-1.238 r0.383
  lines w0.254: 40.503,-5.071 41.27,-5.071 41.27,-4.304 40.503,-4.304 40.503,-5.071 ; 40.503,-2.579 41.27,-2.579 40.887,-3.346 40.503,-2.579
  lines w0.381: 39.494,4.413 45.76,4.413 59.702,4.413 72.611,4.413 82.42,4.413 91.047,4.413 ; 39.494,6.185 45.76,6.185 59.702,6.185 72.611,6.185 82.42,6.185 91.047,6.185 ; 39.494,7.957 45.76,7.957 59.702,7.957 72.611,7.957 82.42,7.957 91.047,7.957 ; 39.494,9.729 45.76,9.729 59.702,9.729 72.611,9.729 82.42,9.729 91.047,9.729 ; 39.494,11.501 45.76,11.501 59.702,11.501 72.611,11.501 82.42,11.501 91.047,11.501 ; 39.494,13.273 45.76,13.273 59.702,13.273 72.611,13.273 82.42,13.273 91.047,13.273 ; 39.494,15.045 45.76,15.045 59.702,15.045 72.611,15.045 82.42,15.045 91.047,15.045 ; 39.494,16.817 45.76,16.817 59.702,16.817 72.611,16.817 82.42,16.817 91.047,16.817 ; 39.494,18.589 45.76,18.589 59.702,18.589 72.611,18.589 82.42,18.589 91.047,18.589 ; 39.494,20.361 45.76,20.361 59.702,20.361 72.611,20.361 82.42,20.361 91.047,20.361 ; 39.494,22.133 91.047,22.133 ; 39.772,-5.588 121.924,-5.588 ; 39.772,-0.414 121.924,-0.414 ; 45.76,23.905 45.76,2.641 ; 46.551,-7.313 46.551,1.311 ; 53.037,-7.313 53.037,1.311 ; 59.702,23.905 59.702,2.641 ; 65.844,-7.313 65.844,1.311 ; 72.105,-7.313 72.105,1.311 ; 72.611,23.905 72.611,2.641 ; 80.987,-7.313 80.987,1.311 ; 82.42,23.905 82.42,2.641 ; 97.243,-7.313 97.243,1.311 ; 104.47,-7.313 104.47,1.311 ; 113.49,-7.313 113.49,1.311 ; 45.76,2.641 39.494,2.641 39.494,23.905 91.047,23.905 91.047,2.641 82.42,2.641 ; 45.76,2.641 59.702,2.641 ; 59.702,2.641 72.611,2.641 ; 72.611,2.641 82.42,2.641 ; 39.772,-7.313 121.924,-7.313 121.924,1.311 39.772,1.311 39.772,-7.313
  text "PCB File:" at 91.925,36.675 h1.2
  text ".Pcb_File_Name_No_Path" at 105.425,36.675 h1.2
  text "Print Date:" at 91.925,34.675 h1.2
  text ".Print_Date" at 105.425,34.675 h1.2
  text "Variant:" at 91.925,32.675 h1.2
  text ".VariantName" at 105.425,32.675 h1.2
  text "Layer" at 40.634,22.576 h0.89
  text "Name" at 46.9,22.576 h0.89
  text "Material" at 60.842,22.576 h0.89
  text "Thickness" at 73.751,22.576 h0.89
  text "Constant" at 83.56,22.576 h0.89
  text "Top Overlay" at 46.9,20.804 h0.89
  text "Top Solder" at 46.9,19.032 h0.89
  text "Solder Resist" at 60.842,19.032 h0.89
  text "0.025mm" at 73.751,19.032 h0.89
  text "3.5" at 83.56,19.032 h0.89
  text "1" at 40.634,17.26 h0.89
  text "Top Layer" at 46.9,17.26 h0.89
  text "0.035mm" at 73.751,17.26 h0.89
  text "Dielectric 2" at 46.9,15.488 h0.89
  text "PP-006" at 60.842,15.488 h0.89
  text "0.200mm" at 73.751,15.488 h0.89
  text "4.1" at 83.56,15.488 h0.89
  text "2" at 40.634,13.716 h0.89
  text "Signal_1" at 46.9,13.716 h0.89
  text "CF-004" at 60.842,13.716 h0.89
  text "0.018mm" at 73.751,13.716 h0.89
  text "Dielectric 1" at 46.9,11.944 h0.89
  text "FR-4" at 60.842,11.944 h0.89
  text "1.065mm" at 73.751,11.944 h0.89
  text "4.6" at 83.56,11.944 h0.89
  text "3" at 40.634,10.172 h0.89
  text "Signal_2" at 46.9,10.172 h0.89
  text "CF-004" at 60.842,10.172 h0.89
  text "0.018mm" at 73.751,10.172 h0.89
  text "Dielectric 3" at 46.9,8.4 h0.89
  text "PP-006" at 60.842,8.4 h0.89
  text "0.200mm" at 73.751,8.4 h0.89
  text "4.1" at 83.56,8.4 h0.89
  text "4" at 40.634,6.628 h0.89
  text "Top Bottom" at 46.9,6.628 h0.89
  text "0.035mm" at 73.751,6.628 h0.89
  text "Bottom Solder" at 46.9,4.856 h0.89
  text "Solder Resist" at 60.842,4.856 h0.89
  text "0.025mm" at 73.751,4.856 h0.89
  text "3.5" at 83.56,4.856 h0.89
  text "Bottom Overlay" at 46.9,3.084 h0.89
  text "Symbol" at 40.807,0.103 h0.83
  text "Count" at 47.069,0.103 h0.83
  text "Hole Size" at 53.554,0.103 h0.83
  text "Plated" at 66.361,0.103 h0.83
  text "Hole Type" at 72.623,0.103 h0.83
  text "Drill Layer Pair" at 81.505,0.103 h0.83
  text "Via/Pad" at 97.76,0.103 h0.83
  text "Pad Shape" at 104.987,0.103 h0.83
  text "Template" at 114.007,0.103 h0.83
  text "2" at 47.069,-1.621 h0.69
  text "1.000mm (39.37mil)" at 53.554,-1.621 h0.69
  text "PTH" at 66.361,-1.621 h0.69
  text "Round" at 72.623,-1.621 h0.69
  text "Top Layer - Top Bottom" at 81.505,-1.621 h0.69
  text "Pad" at 97.76,-1.621 h0.69
  text "(Mixed)" at 104.987,-1.621 h0.69
  text "(Mixed)" at 114.007,-1.621 h0.69
  text "38" at 47.069,-3.346 h0.69
  text "0.300mm (11.81mil)" at 53.554,-3.346 h0.69
  text "PTH" at 66.361,-3.346 h0.69
  text "Round" at 72.623,-3.346 h0.69
  text "Top Layer - Top Bottom" at 81.505,-3.346 h0.69
  text "Via" at 97.76,-3.346 h0.69
  text "Rounded" at 104.987,-3.346 h0.69
  text "v60h30" at 114.007,-3.346 h0.69
  text "44" at 47.069,-5.071 h0.69
  text "1.100mm (43.31mil)" at 53.554,-5.071 h0.69
  text "PTH" at 66.361,-5.071 h0.69
  text "Round" at 72.623,-5.071 h0.69
  text "Top Layer - Top Bottom" at 81.505,-5.071 h0.69
  text "Pad" at 97.76,-5.071 h0.69
  text "(Mixed)" at 104.987,-5.071 h0.69
  text "(Mixed)" at 114.007,-5.071 h0.69
  text "84 Total" at 47.069,-6.795 h0.69

## Dimensions
0,0 to 0,24 on Mechanical 2
0,23.8 to 37,24 on Mechanical 2

## Text inside footprints (layer, text, board x,y; h text height)
D1: Top Overlay "+" at 29.4,4.35 h0.76